# Altium PCB PCB_Paddle_2025-07-14 (1).pcbdoc
Units mil, origin at the board's own origin, x right, y up, seen from the top; angles counter-clockwise.
Board outline 2905 x 3770 mil, 2 copper layers (Top Layer, Bottom Layer); 10 components, 33 nets, 90 pads, 6 vias.
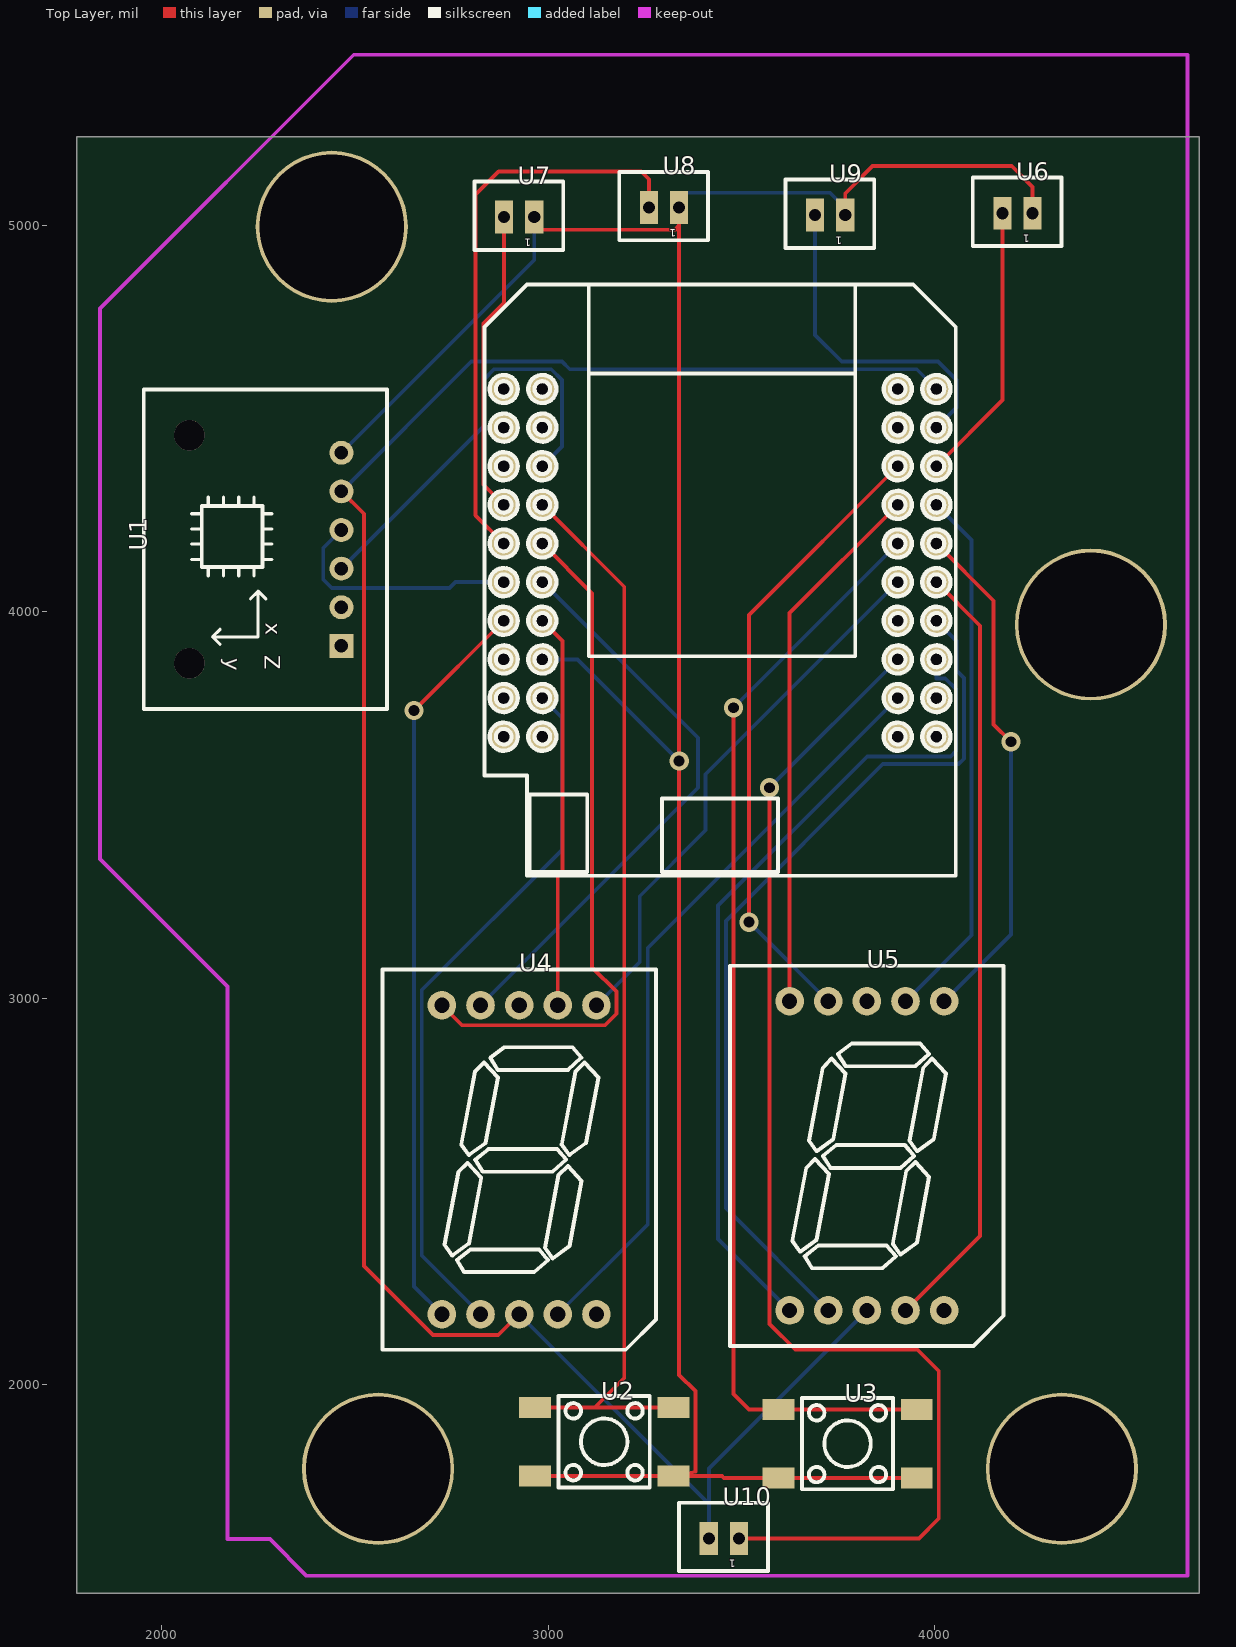
[diagram p0: Top Layer view]
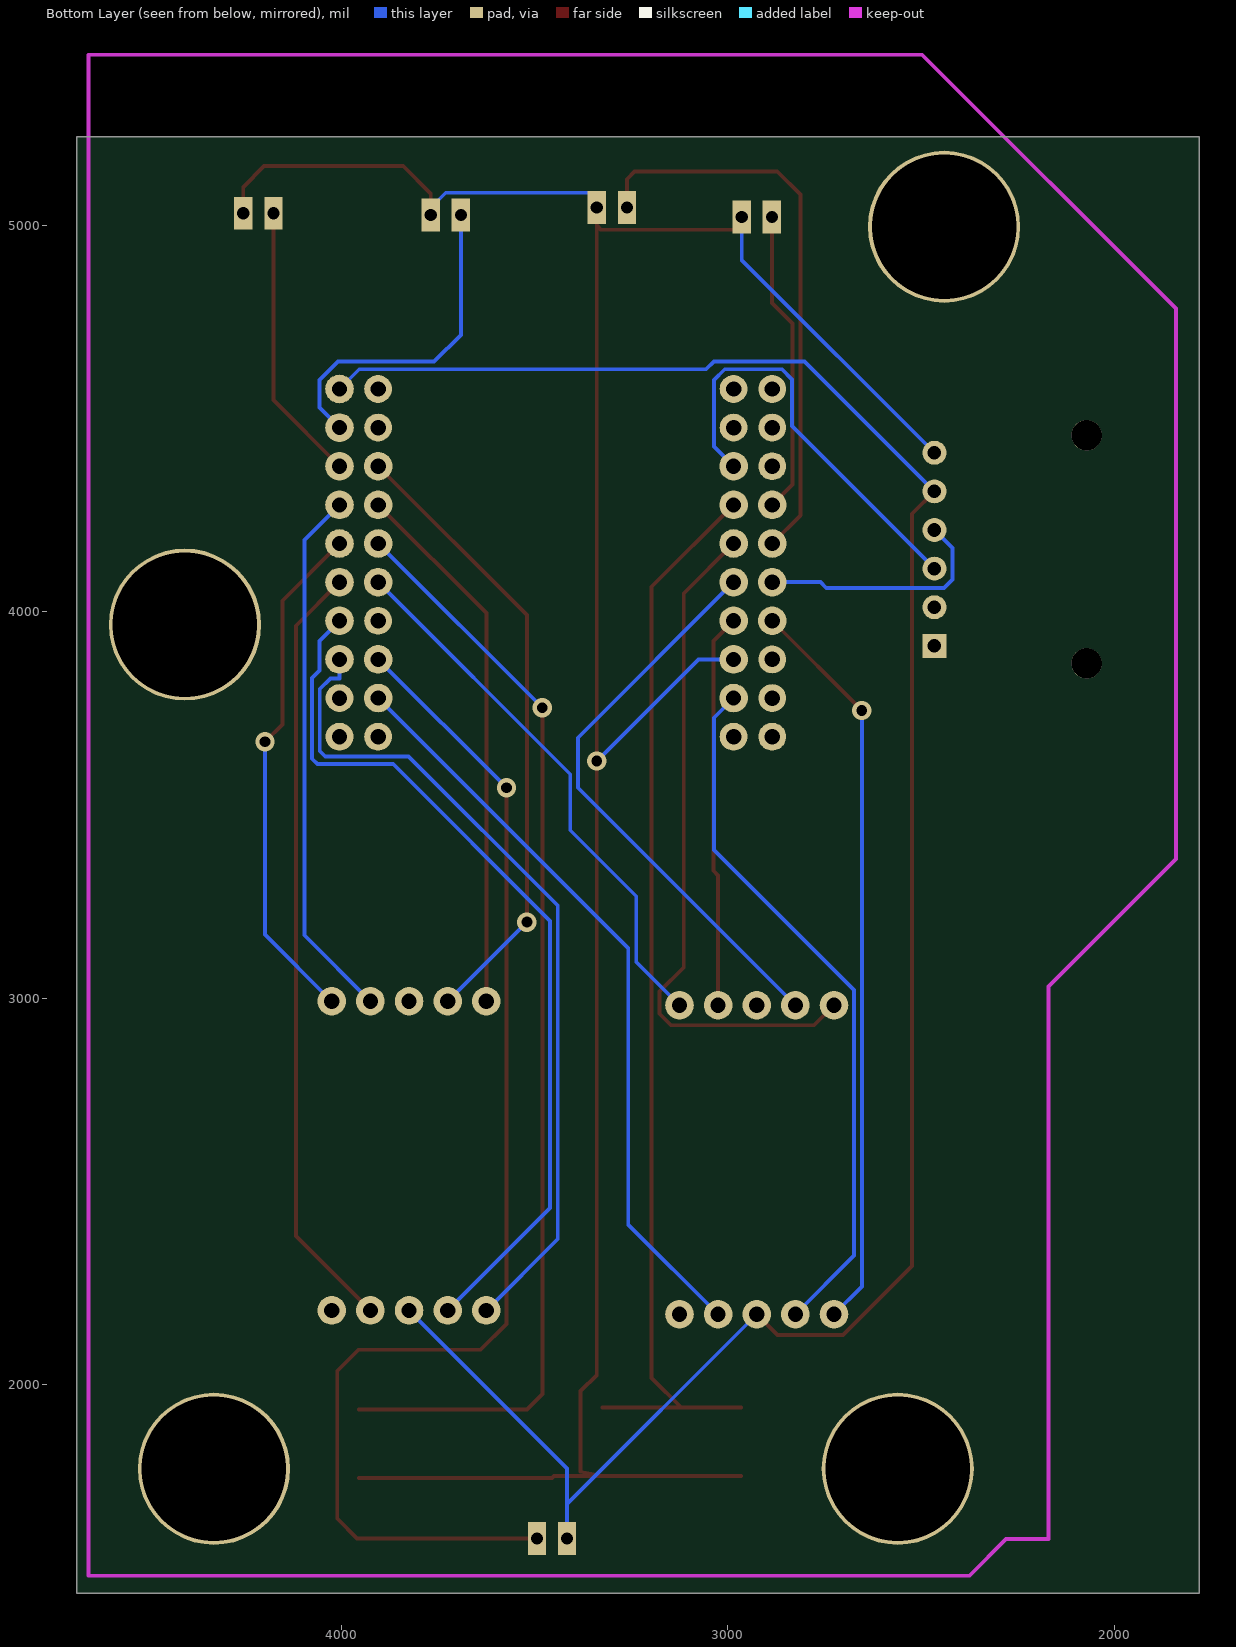
[diagram p1: Bottom Layer view, seen from below]

## Layer stack, top to bottom
Top Solder: solder mask 0.4, Solder Resist, Dk 3.5
Top Layer: signal copper 1.4
Dielectric1: dielectric 12.6, FR-4, Dk 4.8
Bottom Layer: signal copper 1.4
Bottom Solder: solder mask 0.4, Solder Resist, Dk 3.5

## Board outline
4685,1460 1780,1460 1780,5230 4685,5230

## Design rules (kind name [scope] priority, off if disabled: settings)
BoardOutlineClearance [All] p1: gap=7.87 ignorepadtopadclearanceinfootprint=FALSE except(15.75: Arc-SplitBarrior Arc-SplitContinuation Track-SplitBarrior Track-SplitContinuation SMDPad-SplitBarrior SMDPad-SplitContinuation THPad-SplitBarrior THPad-SplitContinuation Via-SplitBarrior Via-SplitContinuation Fill-SplitBarrior Fill-SplitContinuation Poly-SplitBarrior Poly-SplitContinuation Region-SplitBarrior Region-SplitContinuation Text-SplitBarrior Text-SplitContinuation)
Clearance "Clearance Bottom Layer" [OnLayer('Bottom Layer')] p1: gap=8 ignorepadtopadclearanceinfootprint=TRUE except(10: Arc-Text Track-Text SMDPad-Text THPad-Text Via-Text Fill-Text Poly-Text Region-Text Text-Text)
Clearance "Clearance Top Layer" [OnLayer('Top Layer')] p2: gap=8 ignorepadtopadclearanceinfootprint=TRUE except(10: Arc-Text Track-Text SMDPad-Text THPad-Text Via-Text Fill-Text Poly-Text Region-Text Text-Text)
Clearance [All] p3: gap=7.87 ignorepadtopadclearanceinfootprint=FALSE except(3.5: Arc-Arc Arc-Track Arc-SMDPad Track-Track Track-SMDPad SMDPad-SMDPad; 5: Arc-Via Track-Via SMDPad-Via THPad-Via Via-Via; 10: Arc-Text Track-Text SMDPad-Text THPad-Text Via-Text Fill-Text Poly-Text Region-Text Text-Text)
HoleSize [All] p1: absolutevalues=TRUE maxlimit=248.03 minlimit=7.87 maxpercent=80.000 minpercent=20.000
MinimumAnnularRing [All] p1: minimumring=3
MinimumSolderMaskSliver [All] p1: minsoldermaskwidth=3.94
PolygonConnect PolygonConnect_1 [All] p1: thpad.connectstyle=Relief thpad.reliefconductorwidth=20 thpad.reliefentries=4 thpad.polygonreliefangle="90 Angle" thpad.airgapwidth=10 smdpad.connectstyle=Relief smdpad.reliefconductorwidth=20 smdpad.reliefentries=4 smdpad.polygonreliefangle="90 Angle" smdpad.airgapwidth=10 via.connectstyle=Direct via.reliefconductorwidth=20 via.reliefentries=4 via.polygonreliefangle="90 Angle" via.airgapwidth=10
RoutingCorners [All] p1: cornerstyle=Round minsetback=100 maxsetback=100
RoutingVias [All] p1: holewidth=19.68 width=39.37 viastyle="Through Hole" minholewidth=7.87 minwidth=17.72 maxholewidth=39.37 maxwidth=78.74
SilkToSilkClearance [All] p1: silktosilkclearance=3.94
SilkToSolderMaskClearance [IsPad] p1: minsilkscreentomaskgap=3.94 clearancetoexposedcopper=TRUE
SolderMaskExpansion [All] p1: expansion=4 istentingtop=FALSE
Width [All] p1: maxlimit=100 minlimit=3.5 preferedwidth=15
25 further rules are at their usual default settings.

## Components (designator, comment, footprint, x,y, rotation, side; value= is the part's Value field where it differs from the comment)
U1 "MPU6050-TH" COMM-TH_MPU6050-TH 2465,4162 r90 top
U2 "FSM4JSMATR" SW-SMD_4P-L6.0-W6.0-P4.50-LS10.0-1 3145,1852 r0 top
U3 "FSM4JSMATR" SW-SMD_4P-L6.0-W6.0-P4.50-LS10.0-1 3775,1847 r0 top
U4 "7-SEGMENT-DISPLAY-1-RED" 7-SEGMENT-1PTH-EZ 2925,2582 r0 top
U5 "7-SEGMENT-DISPLAY-1-RED" 7-SEGMENT-1PTH-EZ 3825,2592 r0 top
U6 "JST-PH_2-PIN_HEADER" JST_B2B-PH_HEADER 4215,5032 r0 top
U7 "JST-PH_2-PIN_HEADER" JST_B2B-PH_HEADER 2925,5022 r0 top
U8 "JST-PH_2-PIN_HEADER" JST_B2B-PH_HEADER 3300,5047 r0 top
U9 "JST-PH_2-PIN_HEADER" JST_B2B-PH_HEADER 3730,5027 r0 top
U10 "JST-PH_2-PIN_HEADER" JST_B2B-PH_HEADER 3455,1602 r0 top

## Footprints (in the part's own frame and the unit in brackets; to place one, negate y for a bottom-side part, rotate by r counter-clockwise, add the part's x,y. Pads: shape width x height; smd on the part's side, far side on the other; paste and mask are expansions set on the pad)
7-SEGMENT-1PTH-EZ [mil]
  round 74 hole 39.4 paste-99999 mask+2: 1(-200,-400) 2(-100,-400) 3(0,-400) 4(100,-400) 5(200,-400) 6(200,400) 7(100,400) 8(0,400) 9(-100,400) 10(-200,400)
  silkscreen extent -354,-492 354,492
COMM-TH_MPU6050-TH [mil]
  rect 62x62 hole 35 paste-99999 mask+2: 1(-250,0.02)
  round 62 hole 35 paste-99999 mask+2: 2(-150,0.01) 3(-50,0.01) 4(50,0.01) 5(150,0.01) 6(250,0.01)
  round 78.74 hole 78.74 unplated paste-99999: ""(-295.28,393.7) ""(295.27,393.7)
  silkscreen extent -413,-118 413,512
JST_B2B-PH_HEADER [mil]
  rect 47.2x85 hole 31.4 paste-99999 mask+2: P1(39,0) P2(-39,0)
  silkscreen extent -116,-85 114,92
SW-SMD_4P-L6.0-W6.0-P4.50-LS10.0-1 [mm]
  rect 2.1x1.4 smd paste+0 mask+0.051: 1(-4.55,2.25) 2(4.55,2.25) 3(-4.55,-2.25) 4(4.55,-2.25)
  silkscreen extent -3,-3 3,3

## Free pads (board coordinates)
  round 74 hole 39.4 paste-99999 mask+2: 1(2985,3877) 2(2985,4377) 3(2885,4077) 4(2885,4177) 5(2885,4277) 6(4005,4577) 7(4005,4477) 8(4005,4377) 11(2985,4277) 12(4005,4277) 13(4005,4177) 14(4005,4077) 15(4005,3977) 16(4005,3877) 17(3905,4377) 18(3905,4177) 18(3905,4277) 20(3905,4077) 21(2985,4177) 22(2985,4077) 23(2985,3977) 24(2885,3977) 25(2985,3777) 26(3905,3777) 27(3905,3877)
  round 72 hole 40 paste-99999 mask+2: CLK(4005,3677) CMD(2885,3677) GND2(3905,3977) GND3(2885,4577) NC1(2885,4477) NC2(2885,3877) PST(2985,4577) RXD(3905,4477) SD0(3905,3677) SD1(4005,3777) SD2(2885,3777) SD3(2985,3677) SVN(2885,4377) SVP(2985,4477) TXD(3905,4577)
  round 393.7 hole 374.02 paste-99999 mask+2: thru1(2440,4997) thru1(2560,1782) thru1(4330,1782) thru1(4405,3967)

## Via types
v1: diameter 50, hole 28, Top Layer to Bottom Layer, 6 vias

## Nets (pads, with @x,y where several pads share a name; then routed paths per layer and width w, separated by ;. In a path a pad name is that pad's centre, name@x,y a point inside that pad or via, vN(x,y) a via of type N, cw(c..) or ccw(c..) an arc to the next point about the centre after c; other vN are vias at no path point)
S$3855: pad.6 U1.5 U4.3 U5.3 U10.P2 | length 5690.1
  Top Layer w10: U1.5 2522.94,4254.05 2522.94,2306.89 2701.93,2127.9 2870.9,2127.9 U4.3
  Bottom Layer w10: U1.5 2800.99,4648 3036,4648 3056,4628 3954,4628 pad.6 ; U4.3 3416,1691 ; U10.P2 3416,1691 ; U5.3 3416,1783 3416,1691
S$3934: 
U1_1: U1.1
U1_2: U1.2
U1_3: pad.2 U1.3 | length 1111.3
  Bottom Layer w10: U1.3 2834,4481.01 2834,4602 2860,4628 3008,4628 3036,4600 3036,4428 pad.2
U1_4: pad.3 U1.4 | length 629.8
  Bottom Layer w10: U1.4 2418,4165.01 2418,4084 2440,4062 2745,4062 2760,4077 pad.3
U1_6: 
U3_4: pad.1 U1.6 U2.3 U2.4 U3.3 U3.4 U6.P1 U7.P1 U8.P1 U9.P1 | length 7194.4
  Top Layer w10: U7.P1 2964,4989 3328,4989 3339,5000 ; U2.3 U2.4 ; U8.P1 3339,5000 ; U9.P1 3769,5083 3840,5154 4200,5154 4254,5100 U6.P1 ; U3.4 3610,1758.42 U3.3 3454.58,1758.42 3449.58,1763.42 U2.4 ; U2.4 3381,1774.42 3381,1983 3339,2025 v1(3339,3614) 3339,5000
  Bottom Layer w10: U1.6 2964,4911.01 U7.P1 ; pad.1 3076,3877 v1(3339,3614) ; U8.P1 3339,5085 3730,5085 3769,5046 U9.P1
U3_9: pad.18@3905,4177 U3.1 U3.2 | length 2868.2
  Top Layer w10: v1(3480,3752) 3480,1975.58 3520,1935.58 U3.1 U3.2
  Bottom Layer w10: v1(3480,3752) pad.18@3905,4177
U3_A: pad.11 U2.1 U2.2 | length 2814.2
  Top Layer w10: U2.1 3120.58,1940.58 ; pad.11 3197,4065 3197,2017 3120.58,1940.58 ; U2.2 3271.8,1940.59 3120.58,1940.58
U4_1: pad.24 U4.1 | length 1920.9
  Top Layer w10: v1(2653,3745) pad.24
  Bottom Layer w10: v1(2653,3745) 2653,2254 U4.1
U4_2: pad.25 U4.2 | length 1829.4
  Bottom Layer w10: U4.2 2673,2334 2673,3021 3036,3384 3036,3726 pad.25
U4_4: pad.26 U4.4 | length 1959.5
  Bottom Layer w10: U4.4 3257.8,2414.8 3257.8,3129.8 pad.26
U4_5: U4.5
U4_6: pad.20 U4.6 | length 1418.1
  Bottom Layer w10: U4.6 3237,3094 3237,3264.11 3407.72,3434.83 3407.72,3579.72 pad.20
U4_7: pad.23 U4.7 | length 1021.5
  Top Layer w10: pad.23 3037,3925 3037,3330 3025,3318 U4.7
U4_8: U4.8
U4_9: pad.22 U4.9 | length 1494.9
  Bottom Layer w10: U4.9 3387.72,3544.72 3387.72,3674.28 pad.22
U4_10: pad.21 U4.10 | length 1782.5
  Top Layer w10: U4.10 2777,2930 3147,2930 3177,2960 3177,3017 3114,3080 3114,4048 pad.21
U5_1: pad.16 U5.1 | length 2177.9
  Bottom Layer w10: U5.1 3440,2377 3440,3240 3826,3626 4042,3626 4056,3640 4056,3800 4028,3828 4005,3828 pad.16
U5_2: pad.15 U5.2 | length 2294.1
  Bottom Layer w10: U5.2 3460,2457 3460,3200 3866,3606 4062,3606 4076,3620 4076,3829 4057,3848 4057,3925 pad.15
U5_4: pad.14 U5.4 | length 2011.7
  Top Layer w10: U5.4 4118,2385 4118,3964 pad.14
U5_5: U5.5
U5_6: pad.13 U5.6 | length 1336.6
  Top Layer w10: pad.13 4153,4029 4153,3709 v1(4198,3664)
  Bottom Layer w10: U5.6 4198,3165 v1(4198,3664)
U5_7: pad.12 U5.7 | length 1393.5
  Bottom Layer w10: U5.7 4096,3163 4096,4186 pad.12
U5_8: U5.8
U5_9: pad.17 U5.9 | length 1629.4
  Top Layer w10: v1(3520,3197) 3520,3992 pad.17
  Bottom Layer w10: v1(3520,3197) U5.9
U5_10: pad.18@3905,4277 U5.10 | length 1401
  Top Layer w10: U5.10 3625,3997 pad.18@3905,4277
U6_P2: pad.8 U6.P2 | length 725.8
  Top Layer w10: pad.8 4176,4548 U6.P2
U7_P2: pad.5 U7.P2 | length 789.3
  Top Layer w10: pad.5 2832.06,4329.94 2832.06,4746.06 2886,4800 U7.P2
U8_P2: pad.4 U8.P2 | length 1488.4
  Top Layer w10: pad.4 2812,4250 2812,5080 2872,5140 3241,5140 3261,5120 U8.P2
U9_P2: pad.7 U9.P2 | length 869
  Bottom Layer w10: U9.P2 3691,4717 3760,4648 4009,4648 4057,4600 4057,4529 pad.7
VCC: pad.27 U10.P1 | length 3266.2
  Top Layer w10: U10.P1 3960,1602 4011,1653 4011,2035 3956,2090 3640,2090 3573,2157 v1(3573,3545)
  Bottom Layer w10: v1(3573,3545) pad.27
pads on no net: U1.

## Silkscreen, mask and mechanical layers (free items; w line width, h text height)
Top Overlay:
  drawing of 262 lines, arcs and shapes, not listed
Document:
  lines w0.1: 3079.79,3473.49 3079.81,3473.51

## Text inside footprints (layer, text, board x,y; h text height)
U1: Top Overlay "x" at 2268.87,3971.98 h40 r270; Top Overlay "y" at 2165.62,3881.33 h40 r267; Top Overlay "Z" at 2266.3,3887.27 h40 r270
U6: Top Overlay "1" at 4246,4976 h20 r180
U7: Top Overlay "1" at 2956,4966 h20 r180
U8: Top Overlay "1" at 3331,4991 h20 r180
U9: Top Overlay "1" at 3761,4971 h20 r180
U10: Top Overlay "1" at 3486,1546 h20 r180